# Altium PCB remote.PcbDoc (part 2 of 2)
Units mm, origin at the board's own origin, x right, y up, seen from the top; angles counter-clockwise.
Board outline 152.4 x 101.6 mm, 2 copper layers (Top Layer, Bottom Layer); 61 components, 51 nets, 242 pads, 145 vias.
Unrouted connection lines stored in the file: 18.
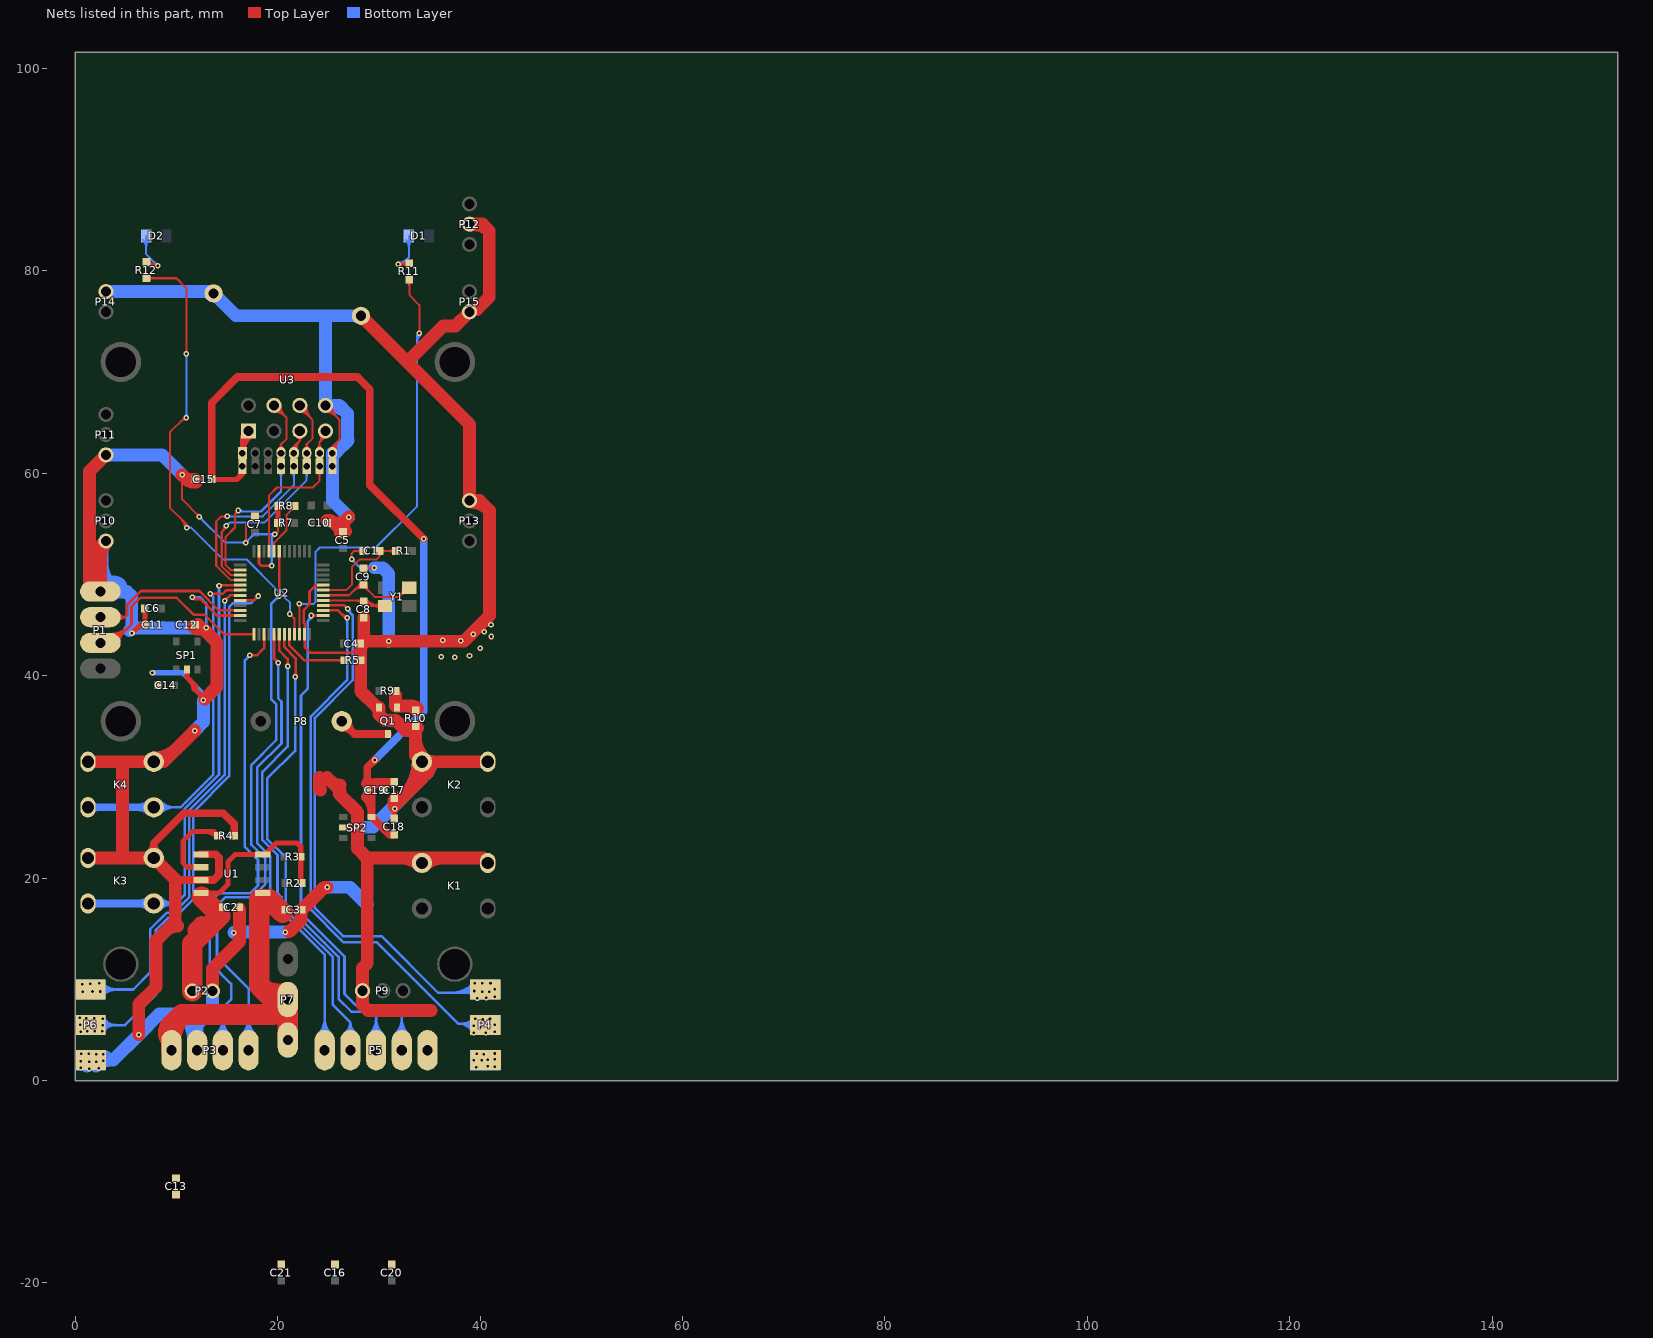
[diagram p2: the nets of this part, all layers, seen from the top]

## Via types
v1: diameter 0.55, hole 0.25, Top Layer to Bottom Layer, tented both sides, 145 vias

## Nets (pads, with @x,y where several pads share a name; then routed paths per layer and width w, separated by ;. In a path a pad name is that pad's centre, name@x,y a point inside that pad or via, vN(x,y) a via of type N, cw(c..) or ccw(c..) an arc to the next point about the centre after c; other vN are vias at no path point) (continued)
GND: C1.2 C2.2 C3.2 C4.1 C5.1 C6.1 C7.1 C8.1 C9.1 C10.2 C11.1 C12.2 C13.2 C14.2 C15.1 C16.2 C17.1 C18.2 C19.2 C20.2 C21.2 K1.2 K2.2 K3.2 K4.2 P1.1 P2.2 P3.2 P4.1 P6.1 P9.1 P10.1 P11.1 P12.2 P13.1 P14.2 P15.2 Q1.2 R4.1 R5.2 R7.1 R8.1 R10.2 SP1.2 SP2.2 U1.1 U1.3 U2.8 U2.23 U2.35 U2.47 U3.8 U3.9 U3.10 | length 618.4
  Top Layer w0.203: v1@10.427,59.727 cw(c10.131,59.431) 10.55,59.431 cw(c10.969,59.431) v1@10.673,59.727 ; v1(10.55,59.85) 10.55,57.425 v1(12.25,55.725) ; v1@12.077,55.725 ccw(c11.658,55.725) 11.954,56.021 ccw(c12.25,56.317) v1@12.25,55.898 ; v1@16.728,53.275 ccw(c16.432,53.571) 16.851,53.571 ccw(c17.269,53.571) v1@16.973,53.275 ; v1(16.851,53.153) 16.851,54.926 17.675,55.75 C7.1@17.75,55.75 ; 17.145,55.22 cw(c17.75,54.615) C7.1@17.75,55.471 ; 17.326,55.401 ccw(c16.977,55.75) C7.1@17.471,55.75 ; v1(19.701,53.978) 19.753,53.978 20.025,54.25 ; v1@19.725,54.149 ccw(c19.774,54.501) 20.025,54.25 ; R7.1@19.827,54.902 cw(c19.35,54.425) 20.025,54.425 cw(c20.7,54.425) R7.1@20.223,54.902 ; v1@19.874,53.978 cw(c20.168,53.978) 19.96,54.185 ; R7.1@20.025,55.1 20.025,54.25 ; U3.8@24.72,66.067 cw(c24.72,64.646) 25.724,65.651 ; U3.8@24.72,66.27 cw(c24.72,65.34) 25.378,65.997 ; U3.8@24.72,66.715 24.72,66.655 26.1,65.275 26.1,63.325 ; U3.8@25.165,66.715 ccw(c26.385,66.715) 25.522,65.853 ; U3.8@25.294,62.475 ccw(c25.242,62.63) 25.405,62.63 ; U3.8@25.348,62.135 cw(c26.061,62.262) 25.549,62.774 ; U3.8@25.368,66.715 ccw(c27.079,66.715) 25.869,65.506 ; U3.8@25.405,61.995 25.405,62.63 ; U3.8@25.516,62.475 cw(c25.568,62.63) 25.405,62.63 ; U3.8@25.548,62.17 cw(c26.529,62.345) 25.824,63.049 ; U3.8@25.748,62.206 cw(c26.997,62.428) 26.1,63.325 ; v1@27.177,51.623 ccw(c26.881,51.919) 27.3,51.919 ccw(c27.719,51.919) v1@27.423,51.623 ; v1(27.3,51.5) 27.3,52.075 27.55,52.325 C1.2@28.45,52.325 ; C1.2@28.252,52.127 ccw(c27.775,51.65) 27.775,52.325 ccw(c27.775,53) C1.2@28.252,52.523 ; C9.1@28.475,50.6 29.475,50.6 v1(29.55,50.675) ; C9.1@28.673,50.402 cw(c29.15,49.925) 29.15,50.6 cw(c29.15,51.275) C9.1@28.673,50.798 ; 28.95,50.6 ccw(c28.95,51.275) v1@29.427,50.798 ; 25.405,62.63 26.1,63.325
  Top Layer w0.254: v1@11.495,47.705 ccw(c11.838,48.007) 11.838,47.55 ; v1(11.575,47.775) 11.75,47.6 11.75,47.55 12.4,47.55 ; v1@11.686,47.873 ccw(c12.4,48.501) 12.4,47.55 ; U2.35@16.3,45.95 14,45.95 12.4,47.55 ; U2.23@18.15,52.3 18.15,51.1 18.4,50.85 19.375,50.85 v1(19.4,50.875) ; 18.982,50.85 ccw(c18.982,51.293) v1@19.295,50.98 ; 19.103,50.85 cw(c19.103,50.578) v1@19.295,50.77 ; 23.541,48.716 cw(c24.05,48.208) U2.8@24.05,48.927 ; U2.8@24.5,48.95 23.775,48.95 23.138,48.312 23.138,47.062 22.575,46.5 22.575,45.225 22.65,45.15 U2.47@22.65,44.1 22.65,42.85 23.25,42.25 27.35,42.25 C4.1@28.2,43.1 ; 27.585,42.485 ccw(c26.896,43.175) C4.1@27.871,43.175
  Top Layer w0.508: v1@5.612,44.187 6.475,45.05 C11.1@6.875,45.05 C6.1@6.875,46.65 ; 5.975,44.55 cw(c6.875,43.651) C11.1@6.875,44.923 ; SP1.2@11.025,40.6 11.025,39.85 11.85,39.025 11.85,38.65 v1@12.65,37.85 ; 11.368,39.507 cw(c10.511,38.65) 11.723,38.65 ; 12.42,38.08 cw(c11.914,37.575) v1@12.629,37.575 ; R7.1@20.025,55.1 20.025,56.75 R8.1@20.05,56.775 ; SP2.2@26.475,25 v1@27.775,25 ; v1@31.5,26.875 31.5,25.925 C18.2@31.525,25.9
  Top Layer w0.762: K3.2@7.322,22.447 ccw(c6.361,23.45) 7.75,23.45 ; K3.2@7.75,22 7.75,23.45 ; K3.2@8.178,22.447 cw(c9.139,23.45) 7.75,23.45 ; 9.875,19.81 U1.3@12.425,19.81 13.66,19.81 14.2,20.35 14.2,22 13.85,22.35 U1.1@12.425,22.35 ; R4.1@15.7,24.2 15.7,25.35 14.625,26.425 10.725,26.425 7.75,23.45
  Top Layer w1.27: K3.2@1.25,22 K3.2@7.75,22 9.875,19.875 9.875,19.81 9.875,15.725 7.975,13.825 7.975,9.25 6.262,7.538 v1(6.262,4.537) ; K4.2@1.25,31.5 4.675,31.5 ; 2.475,51.695 cw(c4.63,51.695) P10.1@3.106,53.219 ; 2.475,52.522 cw(c3.147,52.522) P10.1@3.043,53.186 ; P10.1@3.025,53.3 2.475,52.75 P1.1@2.475,48.325 1.4,49.4 1.4,60.2 P11.1@3.025,61.825 ; 4.675,22.025 4.675,31.5 ; K4.2@7.75,31.865 ccw(c7.75,35.1) 10.037,32.812 ; 8.904,14.754 cw(c10.125,13.534) 10.125,15.26 ; v1(10.55,59.85) 11,59.4 ; 10.815,59.585 ccw(c11.875,60.645) C15.1@11.875,59.146 ; v1(11.8,34.575) 8.725,31.5 K4.2@7.75,31.5 4.675,31.5 ; C15.1@11.875,59.4 11,59.4 ; C15.1@11.945,59.156 cw(c11.68,60.08) 11,59.4 ; C12.2@12.125,45.05 12.588,44.587 12.701,44.587 13.975,43.314 13.975,38.9 v1@12.787,37.712 ; P2.2@13.55,8.85 13.55,11.05 16.225,13.725 C2.2@16.225,16.95 ; 21.1,14.7 21.177,14.777 21.227,14.777 22.284,15.834 22.284,16.784 C3.2@22.375,16.875 24.6,19.1 v1(24.9,19.1) ; 24.125,29.95 24.125,28.8 24.225,28.7 ; 24.875,29.95 26.15,28.675 26.1,28.625 26.1,28.3 27.897,26.503 27.897,22.928 28.85,21.975 ; C10.2@24.886,55.354 cw(c24.935,54.484) 25.55,55.1 ; C10.2@24.9,55.354 cw(c24.9,54.398) 25.576,55.074 ; 25.271,29.554 ccw(c26.15,30.433) 26.15,29.19 ; C5.1@26.196,54.2 cw(c27.755,54.2) 26.653,55.303 ; C5.1@26.207,54.126 cw(c27.139,54.411) 26.45,55.1 ; C5.1@26.45,54.2 25.55,55.1 ; C5.1@26.691,54.281 ccw(c25.55,53.896) 25.55,55.1 ; v1(27.025,55.675) 26.45,55.1 ; U3.10@28.223,75.565 32.794,70.994 36.35,74.55 37.55,74.55 P15.2@38.95,75.95 ; C4.1@28.305,42.995 ccw(c27.833,43.467) C4.1@28.5,43.467 ; C8.1@28.5,45.75 C4.1@28.5,43.4 ; C17.1@31.5,27.646 ccw(c31.5,28.904) 32.389,28.014 ; 31.669,35.556 ccw(c33.625,37.513) R10.2@33.625,34.746 ; C17.1@31.749,27.95 cw(c30.855,27.77) 31.5,27.125 34.25,29.875 K2.2@34.25,31.5 ; 32.222,21.975 cw(c32.222,19.472) K1.2@33.992,21.242 ; 32.478,28.103 ccw(c29.081,31.5) K2.2@33.885,31.5 ; 32.919,70.869 38.95,64.838 P13.1@38.95,57.3 39.95,57.3 40.925,56.325 40.925,45.925 38.4,43.4 v1(30.975,43.4) C4.1@28.5,43.4 ; 33.273,34.6 ccw(c33.273,35.352) R10.2@33.805,34.82 ; 33.625,33.89 ccw(c36.64,33.89) K2.2@34.508,31.758 ; K1.2@34.508,21.242 cw(c36.278,19.472) 36.278,21.975 ; 34.646,30.271 ccw(c33.417,31.5) K2.2@35.155,31.5 ; 35.15,6.925 28.925,6.925 28.375,7.475 P9.1@28.375,8.875 28.375,11.125 28.85,11.6 28.85,17.375 28.85,21.975 ; P13.1@38.95,57.185 cw(c38.95,54.493) 40.853,56.397 ; P15.2@38.95,76.065 ccw(c38.95,77.489) 39.957,76.482 ; P12.2@38.95,84.625 40.225,84.625 40.9,83.95 ; P12.2@38.975,84.513 cw(c39.424,82.474) 40.9,83.95 ; 39.675,76.2 40.9,77.425 40.9,83.95 ; P4.1@39.8,2.275 P4.1@40.2,2.275 ; 39.929,21.975 cw(c39.929,20.929) K1.2@40.669,21.669 ; K1.2@40.75,21.5 40.275,21.975 28.85,21.975 ; K2.2@40.75,31.5 K2.2@34.25,31.5 ; 25.55,55.1 26.45,55.1 ; C4.1@28.5,43.4 28.2,43.1 R5.2@28.2,41.525 28.2,38.474 29.824,36.85 Q1.2@30,36.85 30,36.175 30.597,35.578 31.647,35.578 32.625,34.6 33.625,34.6 33.625,32.125 K2.2@34.25,31.5 ; 1.4,49.387 ccw(c2.537,49.387) 1.733,48.583 cw(c2.537,49.387) 1.4,49.387 ; C12.2@11.645,44.87 ccw(c12.329,45.554) 12.329,44.587 cw(c12.329,45.554) C12.2@11.645,44.87
  Bottom Layer w0.203: P6.1@0.427,1.398 ccw(c0.131,1.694) 0.55,1.694 ccw(c0.969,1.694) 0.673,1.398 ccw(c0.969,1.694) 0.969,1.275 ccw(c0.969,0.856) P6.1@0.673,1.152 ; P6.1@0.427,1.802 cw(c0.131,1.506) 0.55,1.506 cw(c0.969,1.506) 0.673,1.802 cw(c0.848,1.627) P6.1@0.848,1.875 ; P6.1@0.449,1.784 cw(c0.341,1.633) P6.1@0.521,1.585 ; P6.1@0.463,1.775 cw(c0.356,1.589) P6.1@0.563,1.645 ; P6.1@0.537,1.645 cw(c0.744,1.589) P6.1@0.637,1.775 ; P6.1@0.575,2.477 cw(c0.575,2.058) 0.871,2.354 cw(c1.167,2.65) P6.1@0.748,2.65 ; P6.1@0.579,1.585 cw(c0.759,1.633) P6.1@0.651,1.784 ; P6.1@0.673,2.048 ccw(c1.089,2.464) P6.1@1.089,1.875 ; P6.1@0.698,2.527 cw(c0.994,2.231) 0.994,2.65 cw(c0.994,3.069) P6.1@0.698,2.773 ; P6.1@0.715,1.275 cw(c0.715,0.515) P6.1@1.252,1.052 ; P6.1@1.036,2.189 ccw(c1.375,2.527) P6.1@1.375,2.048 ; P6.1@1.097,2.128 cw(c0.843,1.875) P6.1@1.202,1.875 ; P6.1@1.202,2.527 ccw(c0.906,2.231) 0.906,2.65 ccw(c0.906,3.069) P6.1@1.202,2.773 ; P6.1@1.252,1.752 ccw(c0.956,1.456) 0.956,1.875 ccw(c0.956,2.294) P6.1@1.252,1.998 ; P6.1@1.443,2.523 cw(c1.647,2.302) P6.1@1.725,2.593 ; P6.1@1.448,2.527 cw(c1.744,2.231) 1.744,2.65 cw(c1.744,3.069) P6.1@1.448,2.773 ; P6.1@1.475,2.737 ccw(c1.696,2.864) P6.1@1.63,2.618 ; P6.1@1.498,1.052 cw(c1.794,0.756) 1.794,1.175 cw(c1.794,1.594) P6.1@1.498,1.298 ; P6.1@1.498,1.752 cw(c1.733,1.517) P6.1@1.733,1.85 ; P6.1@1.498,1.998 ccw(c1.854,2.354) P6.1@1.854,1.85 ; P6.1@1.5,2 1.225,2 v1(0.575,2.65) v1(1.325,2.65) 2,2.65 v1(2.05,2.6) v1(2.75,2.6) v1(2.75,1.95) 2.65,1.85 v1(2.05,1.85) 1.4,1.85 v1(1.375,1.875) 0.6,1.875 v1(0.55,1.925) v1(0.55,1.275) 1.275,1.275 v1(1.375,1.175) 2.275,1.175 v1(2.3,1.2) ; P6.1@1.511,2.65 cw(c1.511,2.061) P6.1@1.927,2.477 ; P6.1@1.687,1.895 ccw(c1.747,2.118) P6.1@1.92,1.965 ; P6.1@1.751,1.878 cw(c1.687,1.641) P6.1@1.9,1.763 ; P6.1@1.752,2.65 ccw(c1.752,2.898) P6.1@1.927,2.723 ; P6.1@1.821,1.175 ccw(c1.821,1.679) P6.1@2.177,1.323 ; P6.1@1.927,1.727 ccw(c1.631,1.431) 1.631,1.85 ccw(c1.631,2.269) P6.1@1.927,1.973 ; P6.1@1.942,1.175 cw(c1.942,0.842) P6.1@2.177,1.077 ; P6.1@2.09,1.85 ccw(c2.09,2.61) 2.627,2.073 ccw(c2.331,2.369) 2.75,2.369 ccw(c3.169,2.369) P6.1@2.873,2.073 ; P6.1@2.144,1.996 ccw(c2.353,2.319) P6.1@2.453,1.947 ; P6.1@2.173,1.727 cw(c2.469,1.431) 2.469,1.85 cw(c2.469,2.269) P6.1@2.173,1.973 ; P6.1@2.173,2.477 cw(c2.469,2.181) 2.469,2.6 cw(c2.469,3.019) P6.1@2.173,2.723 ; P6.1@2.2,1.763 cw(c2.532,1.572) P6.1@2.433,1.942 ; P6.1@2.627,2.723 cw(c2.331,3.019) 2.331,2.6 cw(c2.331,2.181) 2.627,2.477 cw(c2.331,2.181) 2.75,2.181 cw(c3.169,2.181) P6.1@2.873,2.477 ; P6.1@2.649,2.459 cw(c2.541,2.308) P6.1@2.721,2.26 ; P6.1@2.663,2.45 cw(c2.556,2.264) P6.1@2.763,2.32 ; P6.1@2.737,2.32 cw(c2.944,2.264) P6.1@2.837,2.45 ; P6.1@2.779,2.26 cw(c2.959,2.308) P6.1@2.851,2.459 ; v1@12.25,55.552 cw(c12.25,55.193) 12.503,55.447 ; v1(12.25,55.725) 12.225,55.725 14.797,53.153 v1(16.851,53.153) 16.851,53.176 17.653,53.978 v1(19.701,53.978) ; v1@12.423,55.725 ccw(c12.902,55.725) 12.564,55.386 ; v1@16.728,53.03 ccw(c16.432,52.734) 16.432,53.153 ccw(c16.432,53.571) v1@16.728,53.275 ; v1@16.851,53.326 ccw(c16.851,53.689) 17.107,53.432 ; v1@17.024,53.153 cw(c17.499,53.153) 17.163,53.488 ; v1@19.578,53.855 ccw(c19.282,53.559) 19.282,53.978 ccw(c19.282,54.396) v1@19.578,54.1 ; v1@27.3,51.327 cw(c27.3,50.908) 27.596,51.204 cw(c27.892,51.5) v1@27.473,51.5 ; v1(27.3,51.5) 28.125,50.675 v1(29.55,50.675) ; v1@29.427,50.552 ccw(c29.131,50.256) 29.131,50.675 ccw(c29.131,51.094) v1@29.427,50.798 ; P4.1@39.35,2.173 ccw(c39.35,2.592) 39.646,2.296 ccw(c39.942,2) P4.1@39.523,2 ; P4.1@39.473,1.877 cw(c39.769,1.581) 39.769,2 cw(c39.769,2.419) P4.1@39.473,2.123 ; P4.1@39.486,2.593 cw(c38.945,2.405) v1(39.35,2) ; P4.1@39.545,2.512 cw(c39.384,2.3) P4.1@39.65,2.3 ; P4.1@39.579,2.229 ccw(c39.285,2.523) P4.1@39.678,2.66 ; v1(39.625,1.325) 40.15,1.85 v1(40.15,2) v1(39.35,2) ; P4.1@39.625,1.498 ccw(c39.625,1.917) 39.921,1.621 ccw(c40.217,1.325) P4.1@39.798,1.325 ; P4.1@39.748,1.448 ccw(c39.196,2) P4.1@39.977,2 ; P4.1@39.755,2.512 ccw(c39.916,2.3) P4.1@39.65,2.3 ; P4.1@39.773,2.527 cw(c39.948,2.352) P4.1@39.948,2.6 ; P4.1@39.773,2.773 ccw(c40.189,3.189) P4.1@40.189,2.6 ; P4.1@39.975,2.657 ccw(c40.053,2.948) P4.1@40.257,2.727 ; P4.1@40.027,1.877 ccw(c39.731,1.581) 39.731,2 ccw(c39.731,2.419) P4.1@40.027,2.123 ; P4.1@40.07,2.632 cw(c40.004,2.386) P4.1@40.225,2.513 ; P4.1@40.15,1.97 ccw(c40.15,2.743) P4.1@40.697,2.197 ; P4.1@40.15,2.173 ccw(c40.15,3.437) P4.1@41.043,2.543 ; P4.1@40.252,2.477 ccw(c39.956,2.181) 39.956,2.6 ccw(c39.956,3.019) P4.1@40.252,2.723 ; P4.1@40.375,2.427 cw(c40.375,2.008) 40.671,2.304 cw(c40.967,2.6) P4.1@40.548,2.6 ; P4.1@40.391,2.584 cw(c39.881,2.075) P4.1@40.602,2.075 ; P4.1@40.41,2.455 cw(c40.217,2.12) P4.1@40.602,2.089 ; P4.1@40.422,2.038 cw(c40.498,1.908) P4.1@40.626,1.986 ; P4.1@40.5,2 P4.1@41.175,2.675 ; P4.1@40.57,2.479 cw(c40.185,2.257) P4.1@40.609,2.126 ; P4.1@40.616,2.399 ccw(c40.907,2.566) P4.1@40.82,2.242 ; P4.1@40.627,1.523 ccw(c40.331,1.819) 40.75,1.819 ccw(c41.169,1.819) 40.873,1.523 ccw(c41.229,1.879) P4.1@41.229,1.375 ; P4.1@40.652,1.952 cw(c40.417,1.717) P4.1@40.75,1.717 ; P4.1@40.663,1.55 ccw(c40.541,1.763) P4.1@40.778,1.699 ; P4.1@40.683,2.183 cw(c41.452,1.415) P4.1@41.452,2.502 ; P4.1@40.745,2.073 cw(c41.112,2.093) P4.1@40.852,2.352 ; P4.1@40.746,2.067 cw(c41.075,2.154) P4.1@40.884,2.435 ; P4.1@40.75,1.596 cw(c41.254,1.596) P4.1@40.898,1.952 ; P4.1@40.795,1.763 ccw(c41.018,1.703) P4.1@40.865,1.53 ; P4.1@40.873,1.277 cw(c41.108,1.042) P4.1@41.108,1.375 ; P4.1@40.943,2.119 cw(c41.369,2.232) P4.1@41.121,2.596 ; P4.1@40.948,2.084 cw(c41.725,2.125) P4.1@41.175,2.675 ; P4.1@41.03,2.53 cw(c41.452,2.108) P4.1@41.452,2.705 ; P4.1@41.074,1.417 ccw(c41.138,1.657) P4.1@41.323,1.491 ; P4.1@41.167,1.392 cw(c41.11,1.178) P4.1@41.302,1.288 ; P4.1@41.296,2.599 ccw(c41.175,2.54) P4.1@41.175,2.675 ; P4.1@41.296,2.751 cw(c41.175,2.809) P4.1@41.175,2.675 ; P4.1@41.329,1.252 ccw(c41.033,0.956) 41.033,1.375 ccw(c41.033,1.794) 41.329,1.498 ccw(c41.033,1.794) 41.452,1.794 ccw(c41.871,1.794) P4.1@41.575,1.498 ; P4.1@41.329,1.977 cw(c41.033,1.681) 41.452,1.681 cw(c41.871,1.681) P4.1@41.575,1.977 ; P4.1@41.329,2.223 ccw(c41.033,2.519) 41.452,2.519 ccw(c41.871,2.519) P4.1@41.575,2.223 ; P4.1@41.329,2.553 cw(c41.033,2.257) 41.452,2.257 cw(c41.871,2.257) P4.1@41.575,2.553 ; P4.1@41.356,2.531 cw(c41.278,2.414) 41.414,2.377 cw(c41.633,2.319) P4.1@41.53,2.52 ; P4.1@41.374,2.52 cw(c41.271,2.319) 41.49,2.377 cw(c41.626,2.414) P4.1@41.548,2.531 ; v1(39.35,2) P4.1@39.65,2.3 ; P4.1@39.65,2.3 v1(39.65,2.65) 39.7,2.6 v1(40.375,2.6) 40.737,2.238 40.775,2.2 v1(40.775,2.075) 40.75,2.05 v1(40.75,1.4) 40.775,1.375 v1(41.452,1.375) v1(41.452,2.1) v1(41.452,2.675) P4.1@41.175,2.675
  Bottom Layer w0.254: v1(11.575,47.775) 12.3,47.775 12.925,47.15 v1(12.925,44.725) ; v1@11.68,47.67 cw(c11.932,47.418) 11.932,47.775 cw(c11.932,48.132) v1@11.68,47.88 ; v1@12.82,44.83 ccw(c12.568,45.082) 12.925,45.082 ccw(c13.282,45.082) v1@13.03,44.83 ; v1@19.295,50.98 ccw(c19.043,51.232) 19.4,51.232 ccw(c19.757,51.232) v1@19.505,50.98 ; v1(19.4,50.875) 19.4,53.677 v1(19.701,53.978) ; v1@19.553,53.978 cw(c19.196,53.978) 19.448,53.725 cw(c19.701,53.472) v1@19.701,53.83
  Bottom Layer w0.508: P1.1@2.475,48.325 3.025,48.875 P10.1@3.025,53.3 ; P10.1@2.674,52.949 cw(c1.827,52.103) 3.025,52.103 cw(c4.222,52.103) P10.1@3.376,52.949 ; 3.025,49.986 ccw(c5.136,49.986) P1.1@3.643,48.493 ; 3.025,51.213 ccw(c6.363,51.213) P1.1@4.003,48.853 ; 5.575,44.625 5.675,44.725 ccw(c5.968,44.432) v1@5.618,44.211 ; v1(7.625,40.3) 10.575,40.3 12.65,38.225 v1(12.65,37.575)
  Bottom Layer w1.27: P6.1@1.07,2.395 ccw(c2.025,3.35) P6.1@2.025,2 ; P6.1@1.12,1.43 cw(c2.498,0.052) P6.1@2.498,2 ; P6.1@1.795,2.345 ccw(c2.629,3.179) P6.1@2.629,2 ; P6.1@2.045,1.455 cw(c3.362,0.138) 3.362,2 ; P6.1@2.171,2 ccw(c2.171,3.179) 3.005,2.345 ; P6.1@2.314,2.355 cw(c1.5,3.11) P6.1@1.5,2 3.725,2 v1(6.262,4.537) 8.325,6.6 10.575,6.6 12.04,5.135 ; P1.1@2.475,48.325 5.1,48.325 5.575,47.85 ; P6.1@2.495,2.345 ccw(c3.329,3.179) 3.329,2 ; P1.1@2.963,49.071 cw(c3.644,48.079) 4.495,48.93 ; P11.1@3.025,61.825 8.575,61.825 v1(10.55,59.85) ; P14.2@3.025,77.95 13.5,77.95 U3.9@13.671,77.779 15.885,75.565 25.1,75.565 ; P1.1@3.682,48.024 cw(c4.524,46.799) 5.575,47.85 ; 5.345,44.455 cw(c5.998,43.802) 5.998,44.725 ; 5.575,44.625 5.575,47.85 ; 5.675,44.725 12.5,44.725 ; 10.614,6.561 cw(c8.054,4) P3.2@11.675,4 ; v1(11.8,34.575) 12.65,35.425 v1(12.65,37.575) ; P3.2@12.04,3 12.04,5.135 ; 12.618,77.95 cw(c12.618,76.726) U3.9@13.484,77.592 ; P2.2@13.55,8.85 13.55,7.045 12.04,5.535 12.04,5.135 ; v1(15.675,14.625) 15.725,14.675 v1(20.75,14.675) ; U3.8@24.738,66.601 cw(c25.132,64.132) 26.9,65.9 ; v1(24.9,19.1) 27.125,19.1 28.85,17.375 ; U3.8@25.405,61.96 ccw(c25.405,62.636) 25.883,62.158 ; v1(27.025,55.675) 25.405,57.295 U3.8@25.405,60.695 U3.8@25.405,61.995 25.72,61.995 26.95,63.225 26.9,63.275 26.9,65.9 ; v1(27.8,25.025) 29.4,25.025 34.25,29.875 K2.2@34.25,31.5 ; U3.10@28.223,75.565 25.1,75.565 ; v1(29.55,50.675) 30.375,50.675 30.975,50.075 v1(30.975,43.4) ; 32.478,28.103 ccw(c29.081,31.5) K2.2@33.885,31.5 ; 34.646,30.271 ccw(c33.417,31.5) K2.2@35.155,31.5 ; 25.1,75.565 24.72,75.185 U3.8@24.72,66.715 26.085,66.715 26.9,65.9
  other v1: 31.55,26.875 37.5,41.825 36.175,41.875 38.95,41.975 40.025,42.7 38.075,43.475 36.3,43.525 41.1,43.875 39.325,44.1 5.6,44.2 40.4,44.35 41.075,45.05
JTCK: P1.3 U2.37 | length 26.4
  Top Layer w0.254: P1.3@2.475,43.245 3.72,43.245 5.55,45.075 5.55,46.85 6.4,47.7 10.025,47.7 11.715,46.01 12.79,46.01 14.7,44.1 U2.37@17.65,44.1 ; P1.3@3.475,43.61 ccw(c3.475,45.083) 4.516,44.041 ; P1.3@3.475,43.864 ccw(c3.475,45.95) 4.95,44.475 ; P1.3@3.475,44.118 ccw(c3.475,46.817) 5.384,44.909 ; P1.3@4.094,43.245 cw(c4.997,43.245) 4.358,43.883 ; P1.3@4.348,43.245 cw(c5.864,43.245) 4.792,44.317
JTMS: P1.2 U2.34 | length 19.1
  Top Layer w0.254: P1.2@2.475,45.785 4.91,45.785 ; P1.2@4.025,45.5 cw(c4.492,45.258) 4.492,45.785 cw(c4.492,46.312) P1.2@4.025,46.07 ; P1.2@4.25,45.384 cw(c4.91,45.042) 4.91,45.785 ; P1.2@4.25,46.186 ccw(c4.91,46.528) 4.91,45.785 ; U2.34@16.3,46.45 14.175,46.45 12.25,48.375 6.5,48.375 5.144,47.018 5.144,46.019 4.91,45.785
KEY-B1: P4.2 U2.3 | length 92.9
  Top Layer w0.254: U2.3@24.5,46.45 25.975,46.45 26.7,45.725 v1(26.85,45.725) ; 26.341,46.084 ccw(c26.85,46.592) v1@26.85,45.873
  Bottom Layer w0.254: v1@26.745,45.62 cw(c26.493,45.368) 26.85,45.368 cw(c27.207,45.368) v1@26.955,45.62 ; v1(26.85,45.725) 26.85,39.575 23.269,35.993 23.269,16.884 26.215,13.937 26.215,13.924 26.464,13.675 29.775,13.675 37.825,5.625 P4.2@39.5,5.625 ; 37.825,5.625 cw(c37.825,3.629) P4.2@39.338,4.931 ; 38.194,5.625 ccw(c38.194,7.306) P4.2@39.383,6.117 ; 38.379,5.625 cw(c38.379,4.105) P4.2@39.531,5.096 ; 38.475,5.625 cw(c38.475,4.5) 39.27,5.295 cw(c39.018,5.043) 39.375,5.043 cw(c39.732,5.043) P4.2@39.48,5.295 ; 38.618,5.427 ccw(c38.89,5.916) P4.2@39.274,5.508 ; 38.744,5.499 ccw(c38.986,6.2) P4.2@39.31,5.533 ; 38.807,5.625 ccw(c38.807,6.693) P4.2@39.562,5.938 ; 38.851,5.631 cw(c38.9,5.297) P4.2@39.23,5.369 ; 38.9,5.26 cw(c38.394,4.586) P4.2@39.228,4.704 ; 38.921,5.258 ccw(c39.14,5.65) P4.2@39.448,5.323 ; 38.932,5.625 cw(c38.932,4.581) P4.2@39.723,5.262 ; 38.987,5.606 ccw(c38.613,6.254) P4.2@39.354,6.146 ; P4.2@39.056,5.929 cw(c39.323,5.465) P4.2@39.462,5.982 ; P4.2@39.088,5.625 cw(c39.088,5.113) P4.2@39.45,5.475 ; P4.2@39.119,5.671 cw(c39.166,5.355) P4.2@39.479,5.423 ; P4.2@39.225,5.089 ccw(c39.39,5.384) P4.2@39.621,5.138 ; P4.2@39.27,4.83 ccw(c39.018,5.082) 39.375,5.082 ccw(c39.732,5.082) 39.48,4.83 ccw(c39.732,5.082) 39.732,4.725 ccw(c39.732,4.368) P4.2@39.48,4.62 ; P4.2@39.275,5.366 cw(c39.684,5.506) P4.2@39.462,5.878 ; P4.2@39.309,5.72 ccw(c39.09,5.932) P4.2@39.366,6.062 ; P4.2@39.463,5.281 cw(c39.581,5.122) P4.2@39.702,5.278 ; P4.2@39.484,5.501 ccw(c40,5.979) v1(40,5.275) ; P4.2@39.5,5.977 cw(c39.5,4.714) P4.2@40.393,5.607 ; v1(39.5,6.125) P4.2@39.875,6.125 ; P4.2@39.5,6.231 cw(c39.5,5.581) P4.2@39.959,6.041 ; P4.2@39.502,5.325 ccw(c39.664,5.229) P4.2@39.534,5.093 ; P4.2@39.587,6.005 cw(c39.822,5.678) P4.2@39.927,6.067 ; P4.2@39.712,6.125 cw(c39.712,5.512) P4.2@40.145,5.945 ; P4.2@39.872,5.201 ccw(c39.562,5.022) 39.655,5.367 ccw(c39.747,5.713) P4.2@39.926,5.403 ; P4.2@39.895,5.17 ccw(c39.643,4.918) 39.643,5.275 ccw(c39.643,5.632) P4.2@39.895,5.38 ; P4.2@40.105,5.17 cw(c40.357,4.918) 40.357,5.275 cw(c40.357,5.632) P4.2@40.105,5.38 ; P4.2@40.262,5.275 ccw(c40.262,5.888) P4.2@40.695,5.455 ; P4.2@40.291,5.709 ccw(c40.8,6.217) P4.2@40.8,5.498 ; P4.2@40.346,6.162 ccw(c40.567,6.418) P4.2@40.654,6.092 ; P4.2@40.355,5.945 cw(c40.607,5.693) 40.607,6.05 cw(c40.607,6.407) P4.2@40.355,6.155 ; P4.2@40.389,5.999 ccw(c40.837,5.837) P4.2@40.5,5.5 ; P4.2@40.445,4.62 ccw(c40.193,4.368) 40.193,4.725 ccw(c40.193,5.082) P4.2@40.445,4.83 ; P4.2@40.497,6.05 ccw(c40.497,6.578) P4.2@40.87,6.205 ; v1(40.55,4.725) v1(39.375,4.725) v1(39.375,5.4) 39.5,5.275 v1(40,5.275) ; P4.2@40.721,5.475 cw(c40.626,5.626) P4.2@40.5,5.5 ; P4.2@40.8,5.202 cw(c40.8,4.845) 41.053,5.097 cw(c41.305,5.35) P4.2@40.948,5.35 ; P4.2@40.937,5.957 cw(c40.8,5.446) P4.2@41.258,5.71 ; P4.2@40.975,5.952 cw(c40.975,5.595) 41.228,5.847 cw(c41.48,6.1) P4.2@41.123,6.1 ; P4.2@41.027,5.123 ccw(c41.45,5.547) P4.2@41.45,4.948 ; P4.2@41.113,5.962 cw(c40.65,5.5) P4.2@41.304,5.5 ; P4.2@41.345,4.905 ccw(c41.088,5.162) P4.2@41.452,5.162 ; P4.2@41.347,5.396 cw(c41.095,5.143) 41.452,5.143 cw(c41.809,5.143) P4.2@41.557,5.396 ; P4.2@41.452,5.152 ccw(c41.802,5.152) P4.2@41.555,4.905 ; P4.2@39.605,6.02 cw(c39.857,5.768) P4.2@39.857,6.125 ; P4.2@39.605,6.02 cw(c39.857,5.768) P4.2@39.857,6.125 ; P4.2@39.605,6.02 cw(c39.857,5.768) P4.2@39.857,6.125 ; P4.2@39.605,6.23 ccw(c39.857,6.482) P4.2@39.857,6.125 ; P4.2@39.605,6.23 ccw(c39.857,6.482) P4.2@39.857,6.125 ; P4.2@39.605,6.23 ccw(c39.857,6.482) P4.2@39.857,6.125 ; P4.2@39.875,6.125 cw(c39.875,5.846) 40.12,5.979 ccw(c39.875,5.846) P4.2@39.875,6.125 ; P4.2@39.875,6.125 P4.2@40.5,5.5 ; P4.2@39.875,6.125 40.175,6.125 v1(40.25,6.05) 40.925,6.05 v1(40.975,6.1) 41.452,5.623 v1(41.452,5.5) 41.452,4.802 v1(41.45,4.8) 41.35,4.8 v1(40.8,5.35) 40.725,5.275 v1(40,5.275)
KEY-B2: P4.3 U2.4 | length 91.4
  Top Layer w0.254: U2.4@24.5,46.95 26.575,46.95 v1(26.925,46.6) ; v1@26.777,46.6 ccw(c26.42,46.6) 26.672,46.853 ccw(c26.925,47.105) v1@26.925,46.748
  Bottom Layer w0.254: v1(26.925,46.6) 26.925,46.434 27.404,45.955 27.404,39.554 23.675,35.825 23.675,17.052 26.452,14.275 30.25,14.275 35.85,8.675 39.25,8.675 v1(39.425,8.85) P4.3@39.5,8.775 ; v1@27.073,46.6 ccw(c27.831,46.6) 27.295,46.064 ; 37.108,8.675 ccw(c37.108,11.892) P4.3@39.383,9.617 ; 37.721,8.675 ccw(c37.721,11.279) P4.3@39.562,9.438 ; 38.334,8.675 ccw(c38.334,10.666) P4.3@39.742,9.258 ; 38.645,8.675 ccw(c38.645,9.63) P4.3@39.32,8.955 ; 38.677,8.675 cw(c38.677,7.677) P4.3@39.383,8.383 ; 38.721,8.905 cw(c38.925,8.47) P4.3@39.307,8.76 ; 38.745,8.78 cw(c38.977,8.013) P4.3@39.355,8.72 ; 38.885,8.664 ccw(c38.768,9.304) P4.3@39.303,8.934 ; 38.923,8.994 ccw(c38.363,9.801) P4.3@39.329,9.626 ; 38.947,8.675 ccw(c38.947,10.053) P4.3@39.922,9.078 ; P4.3@39.006,9.038 cw(c39.181,8.664) P4.3@39.509,8.914 ; P4.3@39.012,9.349 cw(c39.359,8.871) P4.3@39.452,9.454 ; P4.3@39.339,8.789 cw(c39.654,9.013) P4.3@39.408,9.311 ; P4.3@39.403,8.704 cw(c39.357,8.392) P4.3@39.63,8.549 ; P4.3@39.425,8.702 cw(c39.425,8.345) 39.678,8.597 cw(c39.93,8.85) P4.3@39.573,8.85 ; P4.3@39.464,8.993 ccw(c39.603,9.506) P4.3@39.892,9.059 ; P4.3@39.475,9.452 cw(c39.475,9.095) 39.728,9.347 cw(c39.98,9.6) P4.3@39.623,9.6 ; P4.3@39.53,8.955 ccw(c39.963,9.388) P4.3@39.963,8.775 ; P4.3@39.546,8.936 cw(c39.876,9.171) P4.3@39.619,9.484 ; P4.3@39.568,8.812 ccw(c39.823,8.743) P4.3@39.594,8.612 ; P4.3@39.573,8.2 ccw(c39.166,8.441) P4.3@39.5,8.775 ; P4.3@39.573,8.856 cw(c40.079,8.879) P4.3@39.765,9.276 ; P4.3@39.58,9.495 cw(c39.832,9.243) 39.832,9.6 cw(c39.832,9.957) P4.3@39.58,9.705 ; v1(39.7,8.125) 40.55,8.125 v1(40.625,8.2) P4.3@40.075,8.2 ; P4.3@39.732,8.543 cw(c39.457,8.269) P4.3@39.791,8.071 ; P4.3@39.805,8.23 ccw(c40.057,8.482) 40.057,8.125 ccw(c40.057,7.768) 39.805,8.02 cw(c40.238,7.587) P4.3@40.238,8.2 ; P4.3@39.83,8.054 cw(c40.075,7.921) P4.3@40.075,8.2 ; P4.3@39.919,9.156 cw(c39.539,8.775) P4.3@40.077,8.775 ; P4.3@40.087,8.125 ccw(c40.087,8.738) 40.52,8.305 cw(c40.268,8.557) 40.268,8.2 cw(c40.268,7.843) P4.3@40.52,8.095 ; P4.3@40.12,8.67 ccw(c39.868,8.418) 39.868,8.775 ccw(c39.868,9.132) P4.3@40.12,8.88 ; P4.3@40.12,9.495 ccw(c39.868,9.243) 39.868,9.6 ccw(c39.868,9.957) P4.3@40.12,9.705 ; P4.3@40.33,8.67 cw(c40.582,8.418) 40.582,8.775 cw(c40.582,9.132) P4.3@40.33,8.88 ; P4.3@40.33,9.495 cw(c40.582,9.243) 40.582,9.6 cw(c40.582,9.957) P4.3@40.33,9.705 ; P4.3@40.5,9 40.075,9 v1(39.475,9.6) v1(40.225,9.6) v1(41.025,9.6) 41.452,9.173 v1(41.452,9.025) v1(41.452,8.3) 40.977,8.775 v1(40.9,8.775) v1(40.225,8.775) P4.3@39.5,8.775 ; P4.3@40.795,8.67 ccw(c40.543,8.418) 40.543,8.775 ccw(c40.543,9.132) P4.3@40.795,8.88 ; P4.3@40.9,8.627 cw(c40.9,8.083) P4.3@41.285,8.468 ; P4.3@40.92,9.495 ccw(c40.668,9.243) 40.668,9.6 ccw(c40.668,9.957) P4.3@40.92,9.705 ; P4.3@40.987,9.457 cw(c40.872,9.027) P4.3@41.257,9.25 ; P4.3@41.025,9.452 cw(c41.025,9.095) 41.278,9.347 cw(c41.53,9.6) P4.3@41.173,9.6 ; P4.3@41.095,9.53 cw(c40.591,9.025) P4.3@41.304,9.025 ; P4.3@41.168,9.562 ccw(c41.429,9.492) P4.3@41.195,9.357 ; P4.3@41.304,8.3 ccw(c40.947,8.3) 41.199,8.553 ccw(c41.452,8.806) P4.3@41.452,8.448 ; P4.3@41.347,8.405 ccw(c41.095,8.658) 41.452,8.658 ccw(c41.809,8.658) P4.3@41.557,8.405 ; P4.3@41.347,8.921 cw(c41.095,8.668) 41.452,8.668 cw(c41.809,8.668) P4.3@41.557,8.921 ; P4.3@39.5,8.775 P4.3@40.075,8.2
KEY-B3: P6.2 U2.32 | length 71.8
  Top Layer w0.254: U2.32@16.3,47.45 17.65,47.45 v1(18.075,47.875) ; v1@17.927,47.875 cw(c17.57,47.875) 17.822,47.622 cw(c18.075,47.37) v1@18.075,47.727
  Bottom Layer w0.254: P6.2@1.2,5.369 ccw(c1.2,5.777) P6.2@1.488,5.488 ; P6.2@1.2,5.623 ccw(c1.2,6.644) P6.2@1.922,5.922 ; P6.2@1.348,5.59 ccw(c0.991,6.208) P6.2@1.702,6.16 ; P6.2@1.704,6.127 cw(c0.987,6.014) P6.2@1.5,5.5 2.075,6.075 ccw(c2.348,5.802) P6.2@2.042,5.565 ; P6.2@1.76,5.828 ccw(c1.563,6.169) P6.2@1.956,6.143 ; P6.2@1.841,5.41 cw(c2.118,5.624) P6.2@1.871,5.871 ; P6.2@1.853,5.853 ccw(c1.596,6.11) P6.2@1.955,6.167 ; P6.2@2.384,5.977 cw(c2.115,5.613) P6.2@2.556,5.509 ; P6.2@2.393,5.03 ccw(c2.147,5.365) P6.2@2.555,5.446 ; P6.2@2.438,5.062 cw(c3.434,4.066) 3.434,5.475 ; P6.2@2.438,5.938 ccw(c3.555,7.055) 3.555,5.475 ; P6.2@2.569,4.853 cw(c3.087,4.839) P6.2@2.828,5.288 ; P6.2@2.595,5.58 ccw(c2.343,5.832) 2.7,5.832 ccw(c3.057,5.832) 2.805,5.58 ccw(c3.057,5.832) 3.057,5.475 ccw(c3.057,5.118) P6.2@2.805,5.37 ; P6.2@2.611,6.005 cw(c2.376,5.808) P6.2@2.672,5.729 ; P6.2@2.617,4.883 cw(c4.047,3.453) 4.047,5.475 ; P6.2@2.617,6.117 ccw(c4.168,7.668) 4.168,5.475 ; P6.2@2.62,5.995 cw(c2.428,5.803) P6.2@2.7,5.803 ; P6.2@2.622,6.074 ccw(c3.26,6.236) P6.2@2.969,5.645 ; P6.2@2.7,5.682 cw(c3.143,5.682) P6.2@2.83,5.995 ; P6.2@2.706,5.81 cw(c2.831,5.844) P6.2@2.782,5.963 ; v1(2.725,6.1) 2.7,6.075 v1(2.7,5.475) 4.925,5.475 7.975,8.525 7.975,14.9 9.15,16.075 9.8,16.075 10.213,16.488 10.238,16.488 11.675,17.925 11.675,26.55 15.2,30.075 15.2,46.775 15.6,47.175 17.375,47.175 v1(18.075,47.875) ; P6.2@2.818,4.812 cw(c3.352,4.669) 3.075,5.147 ; P6.2@2.833,5.409 cw(c3.104,5.275) 3.177,5.569 ; P6.2@2.837,5.532 ccw(c3.053,5.623) 3.109,5.395 ; P6.2@2.868,6.138 ccw(c3.341,6.265) 3.096,5.841 ; v1@17.927,47.875 cw(c17.57,47.875) 17.822,47.622 cw(c18.075,47.37) v1@18.075,47.727
  other v1: 0.525,4.825 1.2,4.85 1.9,4.85 2.675,4.85 1.2,5.475 1.925,5.475 0.5,5.525 1.1,6.15 1.85,6.15 0.45,6.2
KEY-B4: P6.3 U2.31 | length 69.8
  Top Layer w0.254: v1(14.775,47.425) 15.3,47.95 U2.31@16.3,47.95 ; v1@14.775,47.573 ccw(c14.775,47.93) 15.028,47.678 ccw(c15.28,47.425) v1@14.923,47.425
  Bottom Layer w0.254: P6.3@0.7,9.377 cw(c0.7,8.356) P6.3@1.422,9.078 ; v1(0.7,9.525) P6.3@0.975,9.525 ; P6.3@0.7,9.631 cw(c0.7,9.223) P6.3@0.988,9.512 ; v1(0.725,8.775) 0.75,8.8 v1(1.7,8.8) v1(2.45,8.8) P6.3@2.375,8.875 ; P6.3@0.805,9.42 cw(c1.057,9.168) P6.3@1.057,9.525 ; P6.3@0.805,9.63 ccw(c1.057,9.882) P6.3@1.057,9.525 ; P6.3@0.83,8.67 cw(c1.143,8.357) P6.3@1.143,8.8 ; P6.3@0.83,8.88 ccw(c1.022,9.072) P6.3@1.022,8.8 ; P6.3@1.178,9.525 cw(c1.178,9.253) P6.3@1.37,9.445 ; P6.3@1.37,9.655 cw(c1.057,9.968) P6.3@1.057,9.525 ; P6.3@1.5,9 P6.3@0.975,9.525 ; P6.3@1.552,8.8 ccw(c1.195,8.8) 1.447,9.053 ccw(c1.7,9.305) P6.3@1.7,8.948 ; P6.3@1.58,9.445 cw(c1.953,9.072) P6.3@1.953,9.6 ; P6.3@1.595,8.695 ccw(c1.343,8.443) 1.343,8.8 ccw(c1.343,9.157) P6.3@1.595,8.905 ; P6.3@1.805,8.695 cw(c2.057,8.443) 2.057,8.8 cw(c2.057,9.157) P6.3@1.805,8.905 ; P6.3@2.27,9.705 cw(c2.018,9.957) 2.018,9.6 cw(c2.018,9.243) 2.27,9.495 cw(c2.018,9.243) 2.375,9.243 cw(c2.732,9.243) P6.3@2.48,9.495 ; P6.3@2.345,8.695 ccw(c2.093,8.443) 2.093,8.8 ccw(c2.093,9.157) P6.3@2.345,8.905 ; P6.3@2.375,9.338 ccw(c2.988,9.338) P6.3@2.555,8.905 ; P6.3@2.403,9.455 cw(c2.57,8.603) 3.055,9.323 ; P6.3@2.427,9.145 cw(c2.847,9.258) P6.3@2.495,9.513 ; P6.3@2.438,8.562 cw(c3.494,7.506) 3.494,9 cw(c3.494,10.494) P6.3@2.438,9.438 ; P6.3@2.45,9 5.725,9 7.4,10.675 7.4,14.95 9.05,16.6 9.75,16.6 11.269,18.119 11.269,26.718 14.775,30.225 v1(14.775,47.425) ; P6.3@2.518,9.638 ccw(c3.223,9.827) P6.3@2.858,9.195 ; P6.3@2.538,8.919 ccw(c2.794,9.262) 3.008,8.891 ; P6.3@2.555,8.695 cw(c3.29,7.96) 3.29,9 ; P6.3@2.617,8.383 cw(c4.108,6.892) 4.108,9 cw(c4.108,11.108) P6.3@2.617,9.617 ; P6.3@2.677,9 ccw(c2.677,8.573) P6.3@2.375,8.875 ; v1@14.67,47.32 cw(c14.418,47.068) 14.775,47.068 cw(c15.132,47.068) v1@14.88,47.32 ; P6.3@0.975,9.525 1.45,9.525 v1(1.475,9.55) 1.525,9.6 v1(2.375,9.6) P6.3@2.375,8.875
KEY-B7: K4.1 U2.30 | length 45.5
  Top Layer w0.254: v1(13.325,48.1) 13.325,48.15 13.35,48.175 13.425,48.1 14.575,48.1 14.925,48.45 U2.30@16.3,48.45 ; v1@13.43,47.995 cw(c13.682,47.743) 13.682,48.1 cw(c13.682,48.457) v1@13.43,48.205
  Bottom Layer w0.254: K4.1@7.75,27 10.401,27 13.65,30.249 13.65,47.775 v1(13.325,48.1) ; K4.1@8.188,26.562 cw(c9.244,25.506) 9.244,27 cw(c9.244,28.494) K4.1@8.188,27.438 ; K4.1@8.367,26.383 cw(c9.858,24.892) 9.858,27 cw(c9.858,29.108) K4.1@8.367,27.617 ; v1@13.325,47.952 cw(c13.325,47.595) 13.578,47.847 cw(c13.83,48.1) v1@13.473,48.1
  Bottom Layer w0.762: K4.1@1.25,27 K4.1@7.75,27 ; K4.1@1.511,26.739 cw(c2.141,26.109) 2.141,27 cw(c2.141,27.891) K4.1@1.511,27.261 ; K4.1@7.312,26.562 ccw(c6.256,25.506) 6.256,27 ccw(c6.256,28.494) K4.1@7.312,27.438
KEY-B8: K3.1 U2.29 | length 54.4
  Top Layer w0.254: v1(14.2,48.9) 14.25,48.95 U2.29@16.3,48.95 ; v1@14.305,48.795 cw(c14.678,48.422) 14.678,48.95
  Bottom Layer w0.254: K3.1@7.75,17.5 9.975,17.5 10.8,18.325 10.8,26.824 14.2,30.224 v1(14.2,48.9) ; K3.1@8.188,17.062 cw(c9.244,16.006) 9.244,17.5 cw(c9.244,18.994) K3.1@8.188,17.938 ; K3.1@8.367,16.883 cw(c9.858,15.392) 9.858,17.5 cw(c9.858,19.608) K3.1@8.367,18.117 ; v1@14.095,48.795 cw(c13.843,48.543) 14.2,48.543 cw(c14.557,48.543) v1@14.305,48.795
  Bottom Layer w0.762: K3.1@1.25,17.5 K3.1@7.75,17.5 ; K3.1@1.511,17.239 cw(c2.141,16.609) 2.141,17.5 cw(c2.141,18.391) K3.1@1.511,17.761 ; K3.1@7.312,17.062 ccw(c6.256,16.006) 6.256,17.5 ccw(c6.256,18.994) K3.1@7.312,17.938
KEY-P1: P3.3 U2.39 | length 54.6
  Top Layer w0.254: v1(17.25,42.025) 17.95,42.025 18.65,42.725 U2.39@18.65,44.1 ; v1@17.355,41.92 cw(c17.607,41.668) 17.607,42.025 cw(c17.607,42.382) v1@17.355,42.13
  Bottom Layer w0.254: P3.3@13.963,4.617 ccw(c12.472,6.108) 14.58,6.108 ccw(c16.688,6.108) P3.3@15.197,4.617 ; P3.3@14.142,4.438 ccw(c13.086,5.494) 14.58,5.494 ccw(c16.074,5.494) P3.3@15.018,4.438 ; P3.3@14.58,3 14.58,7.205 15.388,8.012 15.388,9.563 13.3,11.65 13.3,17.625 14.2,18.525 17.3,18.525 18.05,19.275 18.05,21.8 16.75,23.1 16.75,41.525 v1(17.25,42.025) ; v1@17.102,42.025 cw(c16.745,42.025) 16.997,41.772 cw(c17.25,41.52) v1@17.25,41.877
KEY-P2: P3.4 U2.19 | length 63.2
  Top Layer w0.254: v1@20.02,47.98 ccw(c19.707,48.293) 20.15,48.293 ; v1@20.15,47.725 U2.19@20.15,52.3 ; 20.15,48.172 ccw(c20.422,48.172) v1@20.23,47.98
  Bottom Layer w0.254: P3.4@16.503,4.617 ccw(c15.012,6.108) 17.12,6.108 ccw(c19.228,6.108) P3.4@17.737,4.617 ; P3.4@16.682,4.438 ccw(c15.626,5.494) 17.12,5.494 ccw(c18.614,5.494) P3.4@17.558,4.438 ; P3.4@17.12,3 17.12,9.105 14,12.225 14,17.275 14.844,18.119 17.468,18.119 18.775,19.425 18.775,21.925 17.4,23.3 17.4,31.175 19.85,33.625 19.85,37.2 19.35,37.7 19.35,47.1 v1(20.125,47.875) ; v1@19.977,47.875 cw(c19.62,47.875) 19.872,47.622 cw(c20.125,47.37) v1@20.125,47.727
KEY-P3: P5.1 U2.41 | length 51.9
  Top Layer w0.254: U2.41@19.65,44.1 19.65,41.725 20.05,41.325 v1(20.05,41.3) ; 19.78,41.595 cw(c19.484,41.3) v1@19.902,41.3 ; 19.84,41.535 ccw(c20.05,41.745) v1@20.05,41.448
  Bottom Layer w0.254: v1@19.945,41.195 cw(c19.693,40.943) 20.05,40.943 cw(c20.407,40.943) v1@20.155,41.195 ; v1(20.05,41.3) 20.05,37.775 20.375,37.45 20.375,33.325 17.975,30.925 17.975,23.45 19.25,22.175 19.25,18.675 19.987,17.938 19.987,17.088 24.64,12.436 P5.1@24.64,3 ; P5.1@24.023,4.617 ccw(c22.532,6.108) 24.64,6.108 ccw(c26.748,6.108) P5.1@25.257,4.617 ; P5.1@24.202,4.438 ccw(c23.146,5.494) 24.64,5.494 ccw(c26.134,5.494) P5.1@25.078,4.438
KEY-P4: P5.2 U2.42 | length 51.4
  Top Layer w0.254: U2.42@20.15,44.1 20.15,42.475 20.975,41.65 v1(20.975,40.95) ; v1@20.87,41.055 ccw(c20.618,41.307) 20.975,41.307 ccw(c21.332,41.307) v1@21.08,41.055
  Bottom Layer w0.254: v1@20.87,40.845 cw(c20.618,40.593) 20.975,40.593 cw(c21.332,40.593) v1@21.08,40.845 ; v1(20.975,40.95) 20.975,33 18.475,30.5 18.475,23.775 19.975,22.275 19.975,18.525 20.394,18.106 20.394,17.257 24.448,13.202 24.473,13.202 25.45,12.225 25.45,7.475 27.18,5.745 ; P5.2@26.657,4.699 ccw(c25.873,5.745) 27.18,5.745 ; P5.2@26.809,4.495 ccw(c26.253,5.237) 27.18,5.237 ccw(c28.107,5.237) P5.2@27.551,4.495 ; P5.2@27.18,3 27.18,5.745 ; P5.2@27.703,4.699 cw(c28.487,5.745) 27.18,5.745
KEY-P5: P5.3 U2.43 | length 55.1
  Top Layer w0.254: U2.43@20.65,44.1 20.65,42.85 21.775,41.725 21.775,39.925 v1(21.75,39.9) ; v1@21.645,40.005 ccw(c21.332,40.318) 21.775,40.318 ; 21.775,40.197 ccw(c22.047,40.197) v1@21.855,40.005
  Bottom Layer w0.254: v1@21.645,39.795 cw(c21.393,39.543) 21.75,39.543 cw(c22.107,39.543) v1@21.855,39.795 ; v1(21.75,39.9) 21.75,32.625 18.95,29.825 18.95,23.875 20.8,22.025 20.8,17.425 24.617,13.608 24.642,13.608 26.025,12.225 26.025,8.05 27.275,6.8 29.25,6.8 29.72,6.33 P5.3@29.72,3 ; P5.3@29.103,4.617 ccw(c27.612,6.108) 29.72,6.108 ccw(c31.828,6.108) P5.3@30.337,4.617 ; P5.3@29.282,4.438 ccw(c28.226,5.494) 29.72,5.494 ccw(c31.214,5.494) P5.3@30.158,4.438
KEY-P6: P5.4 U2.2 | length 58
  Top Layer w0.254: v1@23.225,45.95 U2.2@24.775,45.95 ; v1@23.405,45.845 cw(c23.657,45.593) 23.657,45.95 cw(c23.657,46.307) v1@23.405,46.055
  Bottom Layer w0.254: v1@23.153,45.933 cw(c22.449,45.851) 22.95,45.35 ; v1(23.3,45.95) 23.3,45.7 22.95,45.35 ; P5.4@31.643,4.617 ccw(c30.152,6.108) 32.26,6.108 ccw(c34.368,6.108) P5.4@32.877,4.617 ; P5.4@31.822,4.438 ccw(c30.766,5.494) 32.26,5.494 ccw(c33.754,5.494) P5.4@32.698,4.438 ; P5.4@32.26,3 32.26,6.44 31.25,7.45 27.7,7.45 26.6,8.55 26.6,12.25 22.3,16.55 22.3,38.05 22.95,38.7 22.95,45.35
NetC2_1: C2.1 C13.1 P2.1 R2.2 R3.2 U1.4 U1.8 | length 31.9
  Top Layer w0.508: U1.4@12.425,18.54 14.215,18.54 15.075,19.4 15.075,21.625 15.8,22.35 U1.8@18.521,22.35 18.725,22.35 19.85,23.475 21.9,23.475 22.275,23.1 R3.2@22.275,22.125 22.275,19.612 R2.2@22.375,19.512 ; U1.8@19.017,22.35 cw(c19.722,22.35) 19.223,22.848 ; 22.275,20.061 ccw(c22.923,20.061) R2.2@22.465,19.602
  Top Layer w2.032: P2.1@11.55,8.85 11.55,13.525 14.325,16.3 12.475,18.15 ; 12.04,14.015 ccw(c10.829,15.225) 12.541,15.225 ; 12.125,14.809 ccw(c12.125,16.521) 13.335,15.31
NetC8_2: C8.2 U2.5 Y1.1 | length 15.8
  Top Layer w0.203: U2.5@24.5,47.45 28.4,47.45 C8.2@28.5,47.35 28.95,46.9 ; 27.584,47.45 cw(c27.584,46.434) C8.2@28.302,47.152 ; 28.067,47.45 ccw(c28.067,47.783) C8.2@28.302,47.548 ; 28.075,47.45 cw(c28.075,46.925) C8.2@28.446,47.296 ; C8.2@28.41,47.26 ccw(c29.28,48.13) 29.28,46.9 ; C8.2@28.512,47.071 cw(c28.536,46.486) 28.95,46.9 ; C8.2@28.554,47.404 ccw(c29.77,48.62) 29.77,46.9 ; C8.2@28.698,47.548 ccw(c30.261,49.111) Y1.1@30.261,46.9 ; C8.2@28.779,47.338 ccw(c29.364,47.314) 28.95,46.9 ; Y1.1@30.148,46.548 ccw(c29.297,45.697) 29.297,46.9 ccw(c29.297,48.103) Y1.1@30.148,47.252 ; Y1.1@30.291,46.691 ccw(c29.787,46.187) 29.787,46.9 ccw(c29.787,47.613) Y1.1@30.291,47.109 ; Y1.1@30.6,46.9 28.95,46.9
NetC9_2: C9.2 U2.6 Y1.3 | length 16.1
  Top Layer w0.203: U2.6@24.5,47.95 27.05,47.95 28.1,49 C9.2@28.475,49 28.475,48.9 29.575,47.8 31.925,47.8 ; 27.358,48.258 cw(c28.475,47.141) 28.475,48.721 cw(c28.475,48.288) 28.781,48.594 ; 27.705,48.605 cw(c28.475,47.835) C9.2@28.475,48.924 ; 28.052,48.952 cw(c28.475,48.528) C9.2@28.475,49.127 ; C9.2@28.754,49 ccw(c29.67,49) 29.023,48.352 ; 32.102,47.977 ccw(c31.379,48.7) Y1.3@32.402,48.7 ; 32.27,48.145 cw(c32.897,47.519) Y1.3@32.899,48.405 ; Y1.3@32.899,48.202 ccw(c32.894,46.831) 31.925,47.8 ; Y1.3@33,48.7 32.825,48.7 31.925,47.8
NetD1_2: D1.2 R11.1 | length 11.2
  Top Layer w0.203: v1(31.9,80.65) 32.9,80.65 R11.1@33,80.75 ; v1@31.987,80.8 ccw(c32.277,81.304) 32.428,80.742 ; v1@32.023,80.527 cw(c32.319,80.231) 32.319,80.65 cw(c32.319,81.069) v1@32.023,80.773 ; v1@32.05,80.563 cw(c32.272,80.435) 32.206,80.683 ; v1@32.084,80.65 ccw(c32.084,81.666) R11.1@32.802,80.948 ; 32.567,80.65 cw(c32.567,80.317) R11.1@32.802,80.552 ; 32.575,80.65 ccw(c32.575,81.175) R11.1@32.946,80.804
  Bottom Layer w0.203: v1@31.9,80.62 ccw(c31.9,81.454) 32.489,80.864 ; v1(31.9,80.65) 32.275,80.65 ; v1@31.9,80.823 ccw(c31.9,82.147) 32.836,81.211 ; v1@32.032,80.538 cw(c32.275,80.331) 32.275,80.65 ; v1@32.032,80.762 ccw(c32.275,80.969) 32.275,80.65 ; D1.2@32.663,83.036 cw(c31.969,82.342) 32.95,82.342 cw(c33.931,82.342) D1.2@33.237,83.036 ; D1.2@32.95,83.45 32.95,81.325 32.275,80.65
NetD2_2: D2.2 R12.1 | length 10.6
  Top Layer w0.203: R12.1@6.916,80.811 ccw(c7.415,81.104) 7.415,80.525 ; R12.1@7.025,80.875 7.375,80.525 v1(8.125,80.525) cw(c8.125,81.521) R12.1@7.266,81.017 ; R12.1@7.091,80.914 ccw(c7.77,81.313) 7.77,80.525 ; v1@7.975,80.438 ccw(c7.612,80.229) 7.721,80.633 ccw(c7.829,81.038) v1@8.038,80.675 ; v1@8.002,80.402 ccw(c7.706,80.106) 7.706,80.525 ccw(c7.706,80.944) v1@8.002,80.648
  Bottom Layer w0.203: D2.2@6.713,83.036 cw(c6.019,82.342) 7,82.342 cw(c7.981,82.342) D2.2@7.287,83.036 ; D2.2@7,83.45 7,81.65 v1(8.125,80.525) ; v1@7.952,80.525 ccw(c7.533,80.525) 7.829,80.821 ccw(c8.125,81.117) v1@8.125,80.698
NetP8_2: P8.2 Q1.3 | length 7.4
  Top Layer w0.762: P8.2@26.325,34.881 cw(c26.325,33.387) 27.382,34.443 cw(c28.438,35.5) P8.2@26.944,35.5 ; P8.2@26.325,35.5 27.575,34.25 Q1.3@30.9,34.25
NetQ1_1: Q1.1 R9.1 R10.1 | length 4.4
  Top Layer w1.27: 31.65,38.075 31.65,37 33.225,37 R10.1@33.625,36.6 ; 33.273,37 cw(c33.273,36.248) 33.805,36.78 ccw(c33.273,36.248) 33.273,37
NetR4_2: R4.2 U1.2 | length 9.5
  Top Layer w0.508: U1.2@12.425,21.08 11.07,21.08 10.625,21.525 10.625,23.65 11.6,24.625 13.675,24.625 R4.2@14.1,24.2 ; 12.767,24.625 cw(c12.767,22.867) R4.2@14.01,24.11
NetR5_1: R5.1 U2.44 | length 8.1
  Top Layer w0.254: U2.44@21.15,44.1 21.15,43 22.625,41.525 R5.1@26.6,41.525 ; R5.1@26.42,41.345 ccw(c25.987,40.912) 25.987,41.525 ccw(c25.987,42.138) R5.1@26.42,41.705
NetR8_2: R8.2 U2.20 | length 6.7
  Top Layer w0.203: U2.20@19.65,52.3 19.65,53.15 20.85,54.35 20.85,55.85 21.65,56.65 R8.2@21.65,56.775 ; 21.085,56.085 ccw(c20.394,56.775) R8.2@21.371,56.775 ; 21.386,56.386 cw(c21.65,56.123) R8.2@21.65,56.496 ; R8.2@21.432,56.432 ccw(c21.088,56.775) R8.2@21.574,56.775
PPM: P5.5
RF-IRQ: U2.21 U3.7 | length 19.9
  Top Layer w0.203: U2.21@19.15,52.3 19.15,57.825 19.925,58.6 23.45,58.6 24.135,59.285 U3.7@24.135,60.695 ; U3.7@23.889,62.391 ccw(c23.294,62.986) 24.135,62.986 ccw(c24.976,62.986) U3.7@24.381,62.391 ; U3.7@23.924,60.134 cw(c23.415,59.625) 24.135,59.625 cw(c24.855,59.625) U3.7@24.346,60.134 ; U3.7@24.135,61.995 24.135,63.06 ; U3.7@24.194,63.796 cw(c23.732,63.463) 24.135,63.06 ; 24.304,63.229 ccw(c23.929,63.604) U3.7@24.359,63.915 ; 24.473,63.398 ccw(c24.125,63.746) U3.7@24.524,64.033 ; 24.518,63.443 cw(c24.72,63.241) U3.7@24.72,63.527 ; U3.7@24.72,64.175 24.72,63.645 24.135,63.06
RFVCC: C15.2 C17.2 C18.1 C19.1 SP2.5 U3.1 | length 98.9
  Top Layer w0.508: C15.2@13.475,59.4 15.975,59.4 16.515,59.94 U3.1@16.515,60.695 U3.1@16.515,61.995 16.515,63.59 U3.1@17.1,64.175 ; 15.979,59.404 ccw(c15.039,60.345) U3.1@16.369,60.345 ; U3.1@16.376,61.706 cw(c16.042,61.372) 16.515,61.372 cw(c16.988,61.372) U3.1@16.654,61.706 ; U3.1@16.376,62.284 ccw(c16.042,62.618) 16.515,62.618 ccw(c16.988,62.618) U3.1@16.654,62.284 ; U3.1@16.515,61.918 cw(c18.916,61.918) U3.1@17.411,63.789 ; 16.515,62.979 cw(c18.062,62.979) U3.1@17.092,64.184
  Top Layer w0.762: C15.2@13.475,59.4 13.475,66.975 16.025,69.525 27.875,69.525 29.1,68.3 29.1,58.85 v1(34.425,53.525) ; 28.589,28.014 cw(c26.933,26.358) 29.275,26.358 ; 28.589,29.336 ccw(c27.959,29.966) 28.85,29.966 ccw(c29.741,29.966) 29.111,29.336 ; 29.022,29.401 ccw(c29.282,29.893) 29.675,29.5 ; C19.1@29.111,28.814 cw(c30.767,27.158) 30.767,29.5 ; 29.219,29.061 cw(c29.675,29.043) 29.675,29.5 ; v1(29.575,31.675) 28.85,30.95 C19.1@28.85,28.675 ; 30.671,24.654 ccw(c31.525,25.507) C18.1@31.525,24.3 31.025,24.3 SP2.5@29.275,26.05 29.275,28.25 C19.1@28.85,28.675 ; C17.2@31.5,29.5 29.675,29.5 ; C19.1@28.85,28.675 29.675,29.5
  Bottom Layer w0.762: v1(29.575,31.675) 34.425,36.525 v1(34.425,53.525)
RST: C1.1 R1.1 U2.7 | length 13
  Top Layer w0.203: U2.7@24.5,48.45 26.775,48.45 27.325,49 27.325,50.725 28.075,51.475 29.75,51.475 30.05,51.775 ; C1.1@29.885,52.099 cw(c29.648,51.775) 30.05,51.775 ; C1.1@30.215,52.099 ccw(c30.452,51.775) 30.05,51.775 ; C1.1@30.248,52.127 cw(c30.725,51.65) 30.725,52.325 cw(c30.725,53) C1.1@30.248,52.523 ; R1.1@31.477,52.127 ccw(c31,51.65) 31,52.325 ccw(c31,53) R1.1@31.477,52.523 ; R1.1@31.675,52.325 C1.1@30.05,52.325 30.05,51.775
SPI2-MISO: U2.27 U3.6 | length 32
  Top Layer w0.203: v1@14.727,54.824 cw(c13.849,54.821) 14.469,54.2 ; 14.814,54.545 ccw(c14.536,54.824) v1@14.93,54.825 ; v1(14.9,54.825) 14.9,54.631 14.469,54.2 ; U2.27@16.3,49.95 15.347,49.95 14.469,50.828 14.469,54.2 ; U3.6@22.18,66.067 cw(c22.18,64.972) 22.954,65.746 ; U3.6@22.18,66.27 cw(c22.18,65.666) 22.607,66.093 ; U3.6@22.18,66.715 22.18,66.52 23.45,65.25 23.45,63.475 22.865,62.89 ; U3.6@22.422,66.715 ccw(c23.477,66.715) 22.731,65.969 ; U3.6@22.625,66.715 ccw(c24.171,66.715) 23.078,65.622 ; U3.6@22.642,62.412 ccw(c22.243,62.89) 22.865,62.89 ; U3.6@22.828,66.715 ccw(c24.865,66.715) 23.425,65.275 ; U3.6@22.865,61.995 22.865,62.89 ; U3.6@23.088,62.412 cw(c23.487,62.89) 22.865,62.89
  Bottom Layer w0.203: v1@14.9,54.675 v1(14.9,54.825) 14.975,54.825 15.3,55.15 ; v1@14.908,54.998 ccw(c14.932,55.518) 15.3,55.15 ; v1@15.073,54.825 cw(c15.311,54.825) 15.143,54.993 ; U3.6@22.654,60.134 cw(c22.145,59.625) 22.865,59.625 cw(c23.585,59.625) U3.6@23.076,60.134 ; U3.6@22.865,60.695 22.865,59.315 18.7,55.15 15.3,55.15
SPI2-MOSI: U2.28 U3.5 | length 27.3
  Top Layer w0.203: 14.521,55.725 ccw(c14.521,56.229) v1@14.877,55.873 ; 14.642,55.725 cw(c14.642,55.392) v1@14.877,55.627 ; v1@15,55.8 14.925,55.725 14.4,55.725 13.925,55.25 13.925,50.869 15.344,49.45 U2.28@16.3,49.45 ; U3.5@21.471,62.474 ccw(c21.415,62.645) 21.595,62.645 ; U3.5@21.588,62.092 cw(c22.198,62.324) 21.736,62.786 ; U3.5@21.595,61.995 21.595,62.645 ; U3.5@21.719,62.474 cw(c21.775,62.645) 21.595,62.645 ; U3.5@21.777,62.164 cw(c22.519,62.447) 21.958,63.008 ; U3.5@21.947,63.57 cw(c21.816,63.23) 22.18,63.23 ; U3.5@21.967,62.237 cw(c22.841,62.569) 22.18,63.23 ; U3.5@22.18,64.175 22.18,63.23 ; U3.5@22.413,63.57 ccw(c22.544,63.23) 22.18,63.23 ; 21.595,62.645 22.18,63.23
  Bottom Layer w0.203: v1(15,55.75) 18.525,55.75 21.595,58.82 U3.5@21.595,60.695 ; v1@15.123,55.627 cw(c15.419,55.331) 15.419,55.75 cw(c15.419,56.169) v1@15.123,55.873 ; U3.5@21.384,60.134 cw(c20.875,59.625) 21.595,59.625 cw(c22.315,59.625) U3.5@21.806,60.134
SPI2-SCK: U2.26 U3.4 | length 28.2
  Top Layer w0.203: v1@15.927,56.325 cw(c15.508,56.325) 15.804,56.029 cw(c16.1,55.733) v1@16.1,56.152 ; v1(16.1,56.325) 15.775,56 15.775,54.65 14.825,53.7 14.825,50.975 15.35,50.45 U2.26@16.3,50.45 ; U3.4@19.64,66.067 cw(c19.64,64.501) 20.747,65.608 cw(c21.854,66.715) U3.4@20.288,66.715 ; U3.4@19.64,66.27 cw(c19.64,65.195) 20.4,65.955 cw(c21.16,66.715) U3.4@20.085,66.715 ; U3.4@19.64,66.715 20.875,65.48 20.875,63.425 20.325,62.875 ; U3.4@20.106,62.416 ccw(c19.735,62.875) 20.325,62.875 ; U3.4@20.325,61.995 20.325,62.875 ; U3.4@20.544,62.416 cw(c20.915,62.875) 20.325,62.875
  Bottom Layer w0.203: v1(16.1,56.325) 16.2,56.225 18.347,56.225 20.325,58.203 U3.4@20.325,60.695 ; v1@16.223,56.448 ccw(c16.76,56.985) 16.76,56.225 ; U3.4@20.114,60.134 cw(c19.605,59.625) 20.325,59.625 cw(c21.045,59.625) U3.4@20.536,60.134
TIM4_CH3: R12.2 U2.45 | length 53.9
  Top Layer w0.203: R12.2@7.025,79.275 10,79.275 10.975,78.3 v1(10.975,71.8) ; R12.2@7.223,79.077 cw(c7.7,78.6) 7.7,79.275 cw(c7.7,79.95) R12.2@7.223,79.473 ; 10.38,65.08 cw(c10.975,64.486) v1@10.975,65.327 ; 10.474,55.476 cw(c9.623,54.625) v1@10.827,54.625 ; 10.821,55.129 cw(c10.317,54.625) v1@11.03,54.625 ; v1@10.852,71.923 ccw(c10.556,72.219) 10.975,72.219 ccw(c11.394,72.219) v1@11.098,71.923 ; v1@10.903,54.769 ccw(c10.782,54.95) 11,54.95 ; v1(10.975,65.5) 10.925,65.55 10.85,65.55 9.35,64.05 9.35,56.6 11,54.95 ; v1(11,54.625) 11,54.95 ; v1@11.097,54.769 cw(c11.218,54.95) 11,54.95 ; v1@21.2,45.927 cw(c21.2,45.508) 21.496,45.804 cw(c21.792,46.1) v1@21.373,46.1 ; v1(21.2,46.1) 21.65,45.65 U2.45@21.65,44.1
  Bottom Layer w0.203: v1@10.852,65.623 ccw(c10.556,65.919) 10.975,65.919 ccw(c11.394,65.919) v1@11.098,65.623 ; v1@10.852,71.677 cw(c10.556,71.381) 10.975,71.381 cw(c11.394,71.381) v1@11.098,71.677 ; v1(10.975,65.5) v1(10.975,71.8) ; v1(11,54.625) 11.444,54.625 14.568,51.501 16.918,51.501 20.015,48.404 20.344,48.404 20.654,48.094 20.654,47.771 21.225,47.2 21.225,46.125 v1(21.2,46.1) ; v1@11.123,54.502 cw(c11.419,54.206) 11.419,54.625 cw(c11.419,55.044) v1@11.123,54.748 ; v1@21.077,46.223 ccw(c20.721,46.579) 21.225,46.579 ; 21.225,46.458 ccw(c21.558,46.458) v1@21.323,46.223
TIM4_CH4: R11.2 U2.46 | length 48.7
  Top Layer w0.203: v1@22.002,46.977 cw(c21.646,46.621) 22.15,46.621 ; U2.46@22.15,44.1 v1@22.15,46.9 ; 22.15,46.742 cw(c22.483,46.742) v1@22.248,46.977 ; R11.2@32.802,78.952 cw(c32.325,78.475) 33,78.475 cw(c33.675,78.475) R11.2@33.198,78.952 ; R11.2@33,79.15 33,77.625 34,76.625 v1(34,73.825) ; v1@33.877,73.948 ccw(c33.581,74.244) 34,74.244 ccw(c34.419,74.244) v1@34.123,73.948
  Bottom Layer w0.203: v1@22.15,47.075 23.525,47.075 23.75,47.3 23.75,52.25 24.175,52.675 29.697,52.675 33.775,56.753 33.775,73.6 v1(34,73.825) ; v1@22.248,46.977 cw(c22.483,46.742) 22.483,47.075 ; v1@22.248,47.223 ccw(c22.604,47.579) 22.604,47.075 ; 33.775,72.863 cw(c34.962,72.863) v1@34.123,73.702 ; 33.775,73.354 cw(c34.471,73.354) v1@33.979,73.846
  other v1: 22.125,47.1
VIN: C3.1 P3.1 P7.1 P7.2 U1.5 | length 48
  Top Layer w2.032: P3.1@9.484,4 cw(c13.038,4.012) 10.525,6.525 ; P3.1@9.489,3.989 cw(c10.261,4.739) 9.5,5.5 ; P3.1@9.5,3 9.5,5.5 ; 19.288,6.525 ccw(c19.288,8.962) P7.2@21.011,7.239 ; 19.747,6.747 cw(c21,5.494) P7.2@21,7.266 ; C3.1@20.48,16.58 19.161,17.9 18.175,17.9 18.175,9.35 ; P7.1@21,4 P7.2@21,8 ; P7.2@21.006,8.735 cw(c20.068,11.243) 18.175,9.35 ; P7.2@21.011,7.989 cw(c20.274,8.749) 19.525,8 ; P7.2@21.013,7.24 cw(c19.525,8.43) 19.525,6.525 ; 9.5,5.5 10.525,6.525 ; 10.525,6.525 19.525,6.525 ; 18.175,9.35 19.525,8 ; 19.525,6.525 P7.2@21,8 ; 19.525,8 P7.2@21,8
pads on no net: K1.1 K2.1 SP1.4 SP2.4 Y1.2 Y1.4

## Keep-outs
Keep-Out Layer:
  lines w0.2: 0,0 42,0 42,91 0,91 0,0

## Other copper
Top Layer:
  pour cut-out: 0,91 42,91 42,61.375 42.05,61.325 41.275,60.55 -0.025,60.55
  pour cut-out: 0.012,11.075 4.187,11.075 4.262,11.15 4.513,10.9 4.5,0 2.65,0.025 0,0
  pour cut-out: 37.512,11.1 41.687,11.1 41.762,11.175 42.012,10.925 42,0.025 40.15,0.05 37.5,0.025
Bottom Layer:
  rectangle net GND: 37.175,1 39.925,3.025
  pour cut-out: 41.95,90.95 -0.05,90.95 -0.05,61.325 -0.1,61.275 0.675,60.5 41.975,60.5
  pour cut-out: 4.488,11.075 0.313,11.075 0.238,11.15 -0.012,10.9 0,0 1.85,0.025 4.5,0
  pour cut-out: 41.988,11.075 37.812,11.075 37.738,11.15 37.487,10.9 37.5,0 39.35,0.025 42,0